# Altium PCB Photography_Light.PcbDoc
Units mil, origin at the board's own origin, x right, y up, seen from the top; angles counter-clockwise.
Board outline 2834.65 x 1653.54 mil, 2 copper layers (Top Layer, Bottom Layer), stack 62.8 mil thick; 18 components, 13 nets, 64 pads, 70 vias.
Unrouted connection lines stored in the file: 17.
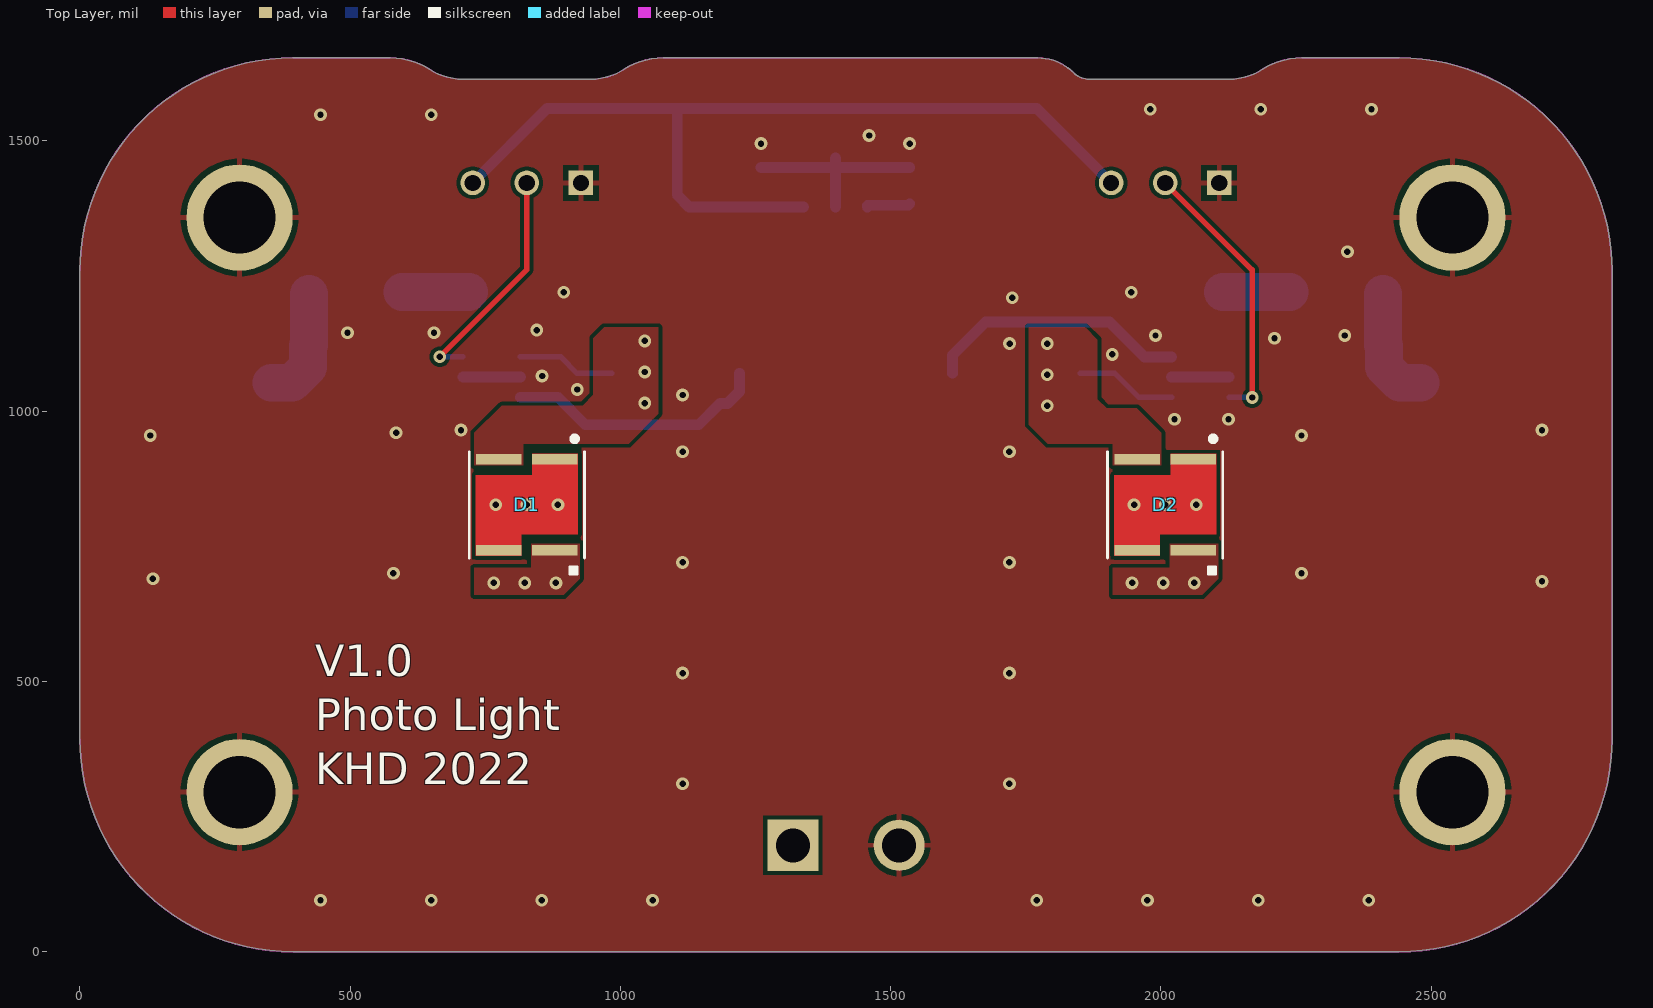
[diagram p0: Top Layer view]
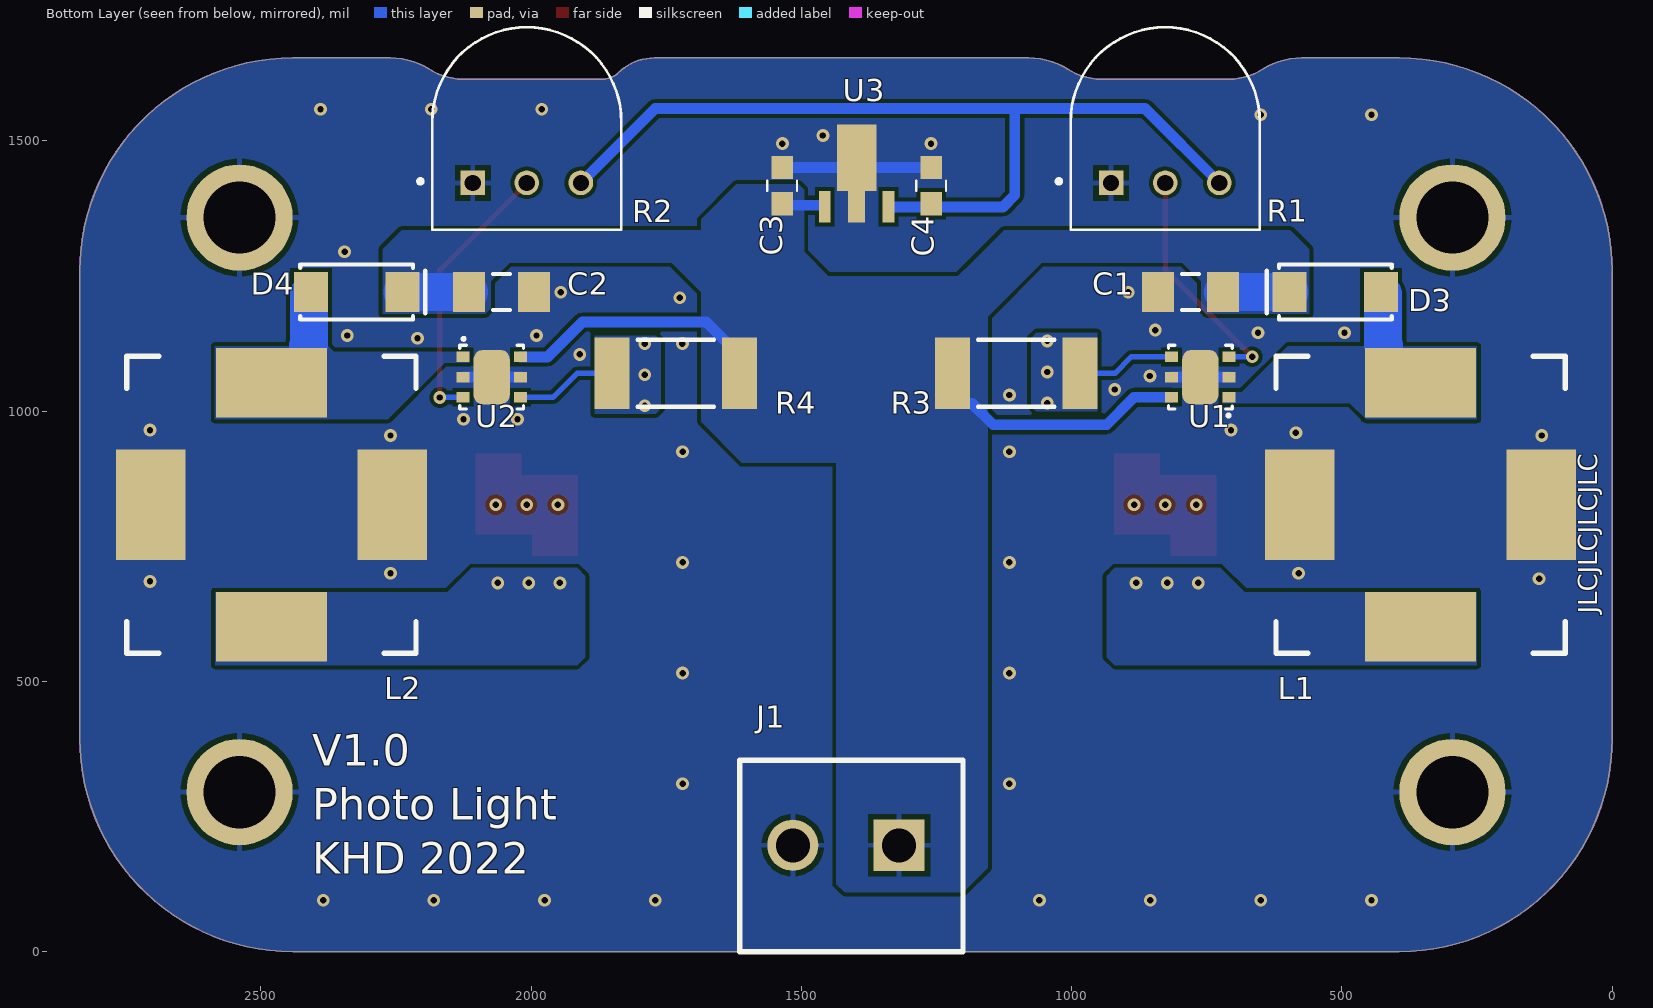
[diagram p1: Bottom Layer view, seen from below]
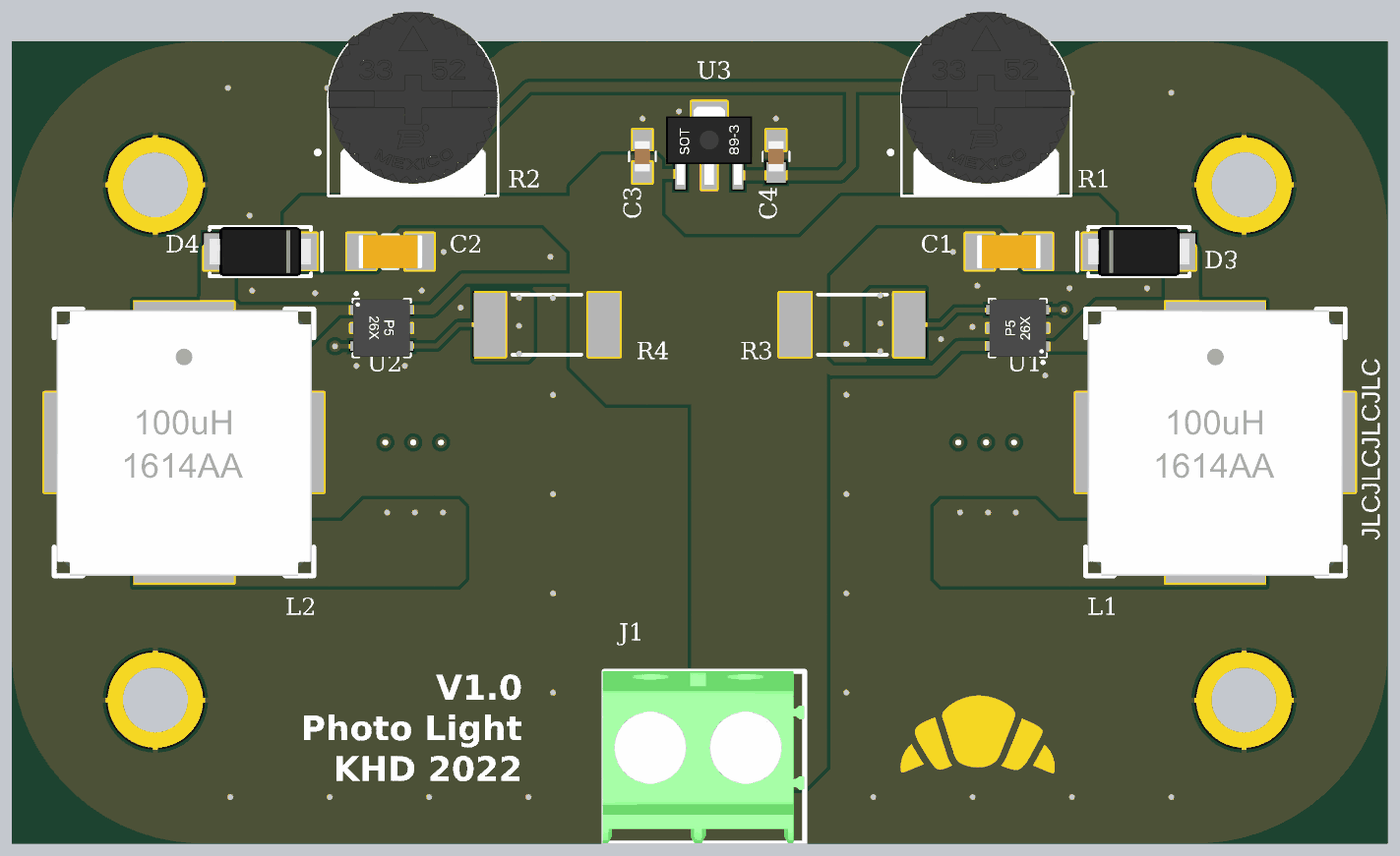
[diagram p2: 3D render of the assembled board from below, using the file's embedded part models]

## Layer stack, top to bottom
Top Solder: solder mask 0.4, Solder Resist, Dk 3.5
Top Layer: signal copper 1.4
Dielectric 1: dielectric 60, FR-4, Dk 4.8
Bottom Layer: signal copper 1.4
Bottom Solder: solder mask 0.4, Solder Resist, Dk 3.5

## Board outline
1838.86,1625.7 ccw(c1866.7,1653.55) 1866.7,1614.17 2125.98,1614.17 ccw(c2125.98,1728.9) 2187.88,1632.3 cw(c2260.4,1519.13) 2260.4,1653.54 2440.94,1653.54 cw(c2440.94,1259.84) 2834.65,1259.84 2834.65,393.7 cw(c2440.95,393.7) 2440.94,0 393.7,0 cw(c393.7,393.7) 0,393.7 0,1259.84 cw(c393.7,1259.84) 393.7,1653.54 574.24,1653.54 cw(c574.25,1519.14) 646.76,1632.3 ccw(c708.66,1728.9) 708.66,1614.17 944.88,1614.17 ccw(c944.88,1728.91) 1006.78,1632.3 cw(c1079.3,1519.13) 1079.3,1653.54 1771.65,1653.54 cw(c1771.65,1558.5)

## Design rules (kind name [scope] priority, off if disabled: settings)
Clearance [All] p1: gap=7 ignorepadtopadclearanceinfootprint=FALSE
HoleSize [All] p1: absolutevalues=TRUE maxlimit=150 minlimit=1 maxpercent=80.000 minpercent=20.000
PolygonConnect [All] p1: thpad.connectstyle=Relief thpad.reliefconductorwidth=10 thpad.reliefentries=4 thpad.polygonreliefangle="90 Angle" thpad.airgapwidth=10 smdpad.connectstyle=Direct smdpad.reliefconductorwidth=10 smdpad.reliefentries=4 smdpad.polygonreliefangle="90 Angle" smdpad.airgapwidth=10 via.connectstyle=Direct via.reliefconductorwidth=10 via.reliefentries=4 via.polygonreliefangle="90 Angle" via.airgapwidth=10
RoutingVias [All] p1: holewidth=28 width=50 viastyle="Through Hole" minholewidth=28 minwidth=50 maxholewidth=28 maxwidth=50
SolderMaskExpansion [All] p1: expansion=4 istentingtop=FALSE
Width [All] p1: maxlimit=100 minlimit=6 preferedwidth=10
29 further rules are at their usual default settings.

## Components (designator, comment, footprint, x,y, rotation, side; value= is the part's Value field where it differs from the comment)
C1 "C1206 10uF 35V X7R" C1206-IPC 780,1220.47 r180 bottom value=10uF
C2 "C1206 10uF 35V X7R" C1206-IPC 2054.65,1220.47 r0 bottom value=10uF
C3 "C0603 1uF 50V X7R" C0603-IPC 1535.43,1417.32 r270 bottom value=1uF
C4 "C0603 1uF 50V X7R" C0603-IPC 1259.84,1417.32 r270 bottom value=1uF
D1 "XHP50D-00-0000-0D0BJ20E7" "LED_XHP50B - 12V Configuration Only" 826.77,826.77 r90 top
D2 "XHP50D-00-0000-0D0UH40E3" "LED_XHP50B - 12V Configuration Only" 2007.87,826.77 r90 top
D3 "SK56AFL-TP" "DO221AC (SMA-FL)" 511.81,1220.47 r180 bottom
D4 "SK56AFL-TP" "DO221AC (SMA-FL)" 2322.83,1220.47 r0 bottom
J1 "Phoenix Contact 1935161" Phoenix_1935161 1417.32,196.85 r0 bottom
L1 "IHLE5050FHER101M51" IHLE-5050FH-51 354.33,826.77 r180 bottom value=100uH
L2 "IHLE5050FHER101M51" IHLE-5050FH-51 2480.32,826.77 r180 bottom value=100uH
R1 "CTRL_3000K" TRIM_3352T-1-103LF 826.77,1535.43 r180 bottom
R2 "CTRL_5000K" TRIM_3352T-1-103LF 2007.87,1535.43 r180 bottom
R3 "R2512 0.1R 1%" R2512-IPC 1102.36,1070 r0 bottom value=0.1
R4 "R2512 0.1R 1%" R2512-IPC 1732.28,1070 r180 bottom value=0.1
U1 "AL8862FF-7" U-DFN3030-6 761.81,1062.99 r0 bottom
U2 "AL8862FF-7" U-DFN3030-6 2072.83,1062.99 r180 bottom
U3 "AP2204R-3.3TRG1" SOT-89 1397.64,1377.95 r180 bottom

## Footprints (in the part's own frame and the unit in brackets; to place one, negate y for a bottom-side part, rotate by r counter-clockwise, add the part's x,y. Pads: shape width x height; smd on the part's side, far side on the other; paste and mask are expansions set on the pad)
C0603-IPC [mm]
  rect 1.1x1 smd: 1(-0.85,0) 2(0.85,0)
  silkscreen extent -0.24,-0.7 0.26,0.7, body extent -0.8,-0.4 0.8,0.4, height 0.3
C1206-IPC [mm] "Chip Capacitor, 2-Leads, Body 3.20x1.60mm, IPC Low Density"
  rect 1.5x1.9 smd: 1(-1.525,0) 2(1.525,0)
  silkscreen extent -0.4,-0.85 0.4,0.85, body extent -1.68,-0.87 1.68,0.87, height 0.71
"DO221AC (SMA-FL)" [mm] "SMA-FL DO221AC"
  rect 1.6x1.9 smd: A(2.15,0) K(-2.15,0)
  silkscreen extent -3.22,-1.29 2.65,1.29, body extent -2.65,-1.29 2.65,1.29, height 0.9
IHLE-5050FH-51 [mm] "Vishay IHLE High Current Inductors with E-Field Shield"
  rect 5.21x3.265 smd: 1(0,5.733) 2(0,-5.733)
  rect 3.275x5.21 smd: SHIELD(-5.677,0) SHIELD(5.677,0)
  silkscreen extent -6.79,-6.99 6.79,6.99, body extent -6.68,-6.99 6.68,6.93, height 6.52
"LED_XHP50B - 12V Configuration Only" [mm] "Cree XHP50.3 12V Footprint"
  rect 0.5x2.14 smd: A+(2.14,1.32) AC(-2.14,1.32) AC(2.14,-1.32) B-(-2.14,-1.32)
  rect 0.5x0.5 smd paste-1 mask+0: AC(0,0)
  Top Layer region: 1.39,-0.25 2.39,-0.25 2.39,-2.39 -1.39,-2.39 -1.39,0.25 -2.39,0.25 -2.39,2.39 1.39,2.39
  silkscreen extent -3.27,-2.71 3.2,2.71, body extent -2.5,-2.5 2.5,2.5, height 3.49
Phoenix_1935161 [mm] "Phoenix Contact 1935161 2-pos terminal block"
  rect 2.4x2.4 hole 1.6: 1(-2.5,0)
  round 2.4 hole 1.6: 2(2.5,0)
  silkscreen extent -5.5,-4 5,5, body extent -5.48,-4 5.09,5, height 11.41
R2512-IPC [mm] "Chip Resistor, 2-Leads, Body 6.35x3.10mm, IPC Low Density"
  rect 1.65x3.35 smd: 1(-3,0) 2(3,0)
  silkscreen extent -1.8,-1.58 1.8,1.58, body extent -3.27,-1.63 3.27,1.63, height 0.7
SOT-89 [mm] "SOT-89 for AP2204R"
  rect 0.55x1.475 smd: 1(-1.5,0) 3(1.5,0)
  rect 0.8x1.475 smd: 2(0,0)
  rect 1.85x3.125 smd: 2(0,2.3)
  body extent -2.25,-0.5 2.25,3.6, height 1.5
TRIM_3352T-1-103LF [mm]
  rect 1.16x1.16 hole 0.76: 1(-2.54,-2.87)
  round 1.16 hole 0.76: 2(0,-2.87) 3(2.54,-2.87)
  silkscreen extent -5.1,-5.08 4.44,4.44, body extent -4.44,-5.08 4.44,4.57, height 4.03
U-DFN3030-6 [mm] "Diodes Inc DFN3030 6 Pin EP"
  rect 0.6x0.5 smd mask+0.06: 1(-1.35,0.95) 2(-1.35,0) 3(-1.35,-0.95) 4(1.35,-0.95) 5(1.35,0) 6(1.35,0.95)
  rrect50% 1.7x2.55 smd mask+0: 7(0,0)
  silkscreen extent -1.5,-1.5 1.5,1.87, body extent -1.5,-1.5 1.5,1.5, height 0.6

## Part data
C1 C2: library part "C1206 10uF 25V X7R", "CAP CER 10UF 35V X7R 1206", Max. Voltage=35V, Supplier Part Number 1=CL31B106KLHNNNE, EIA Code=X7R, Features="Soft Termination", Supplier 1=Digi-Key
C3 C4: "CAP CER 1UF 50V X7R 0603", Max. Voltage=50V, EIA Code=X7R
D1: "3000K LED Lighting series White, Warm 3000K 11.2V 700mA 120° 2020 (5050 Metric)", Supplier Part Number 1=90-XHP50D-00-0000-0D0BJ20E7CT-ND, MF="Cree Inc.", MP=XHP50D-00-0000-0D0BJ20E7, Supplier 1=Digi-Key, Supplier 2=Mouser, Supplier Part Number 2=941-XHP50D00D0BJ20E7
D2: "5000K LED Lighting series White, Cool 5000K 11.2V 700mA 120° 2020 (5050 Metric)", Supplier Part Number 1=90-XHP50D-00-0000-0D0UH40E3CT-ND, MF="Cree Inc.", MP=XHP50D-00-0000-0D0UH40E3, Supplier 1=Digi-Key, Supplier 2=Mouser, Supplier Part Number 2=941-XHP50D00D0UH40E3
D3 D4: "Diode Schottky 60 V 5A Surface Mount DO-221AC (SMA-FL)", Supplier Part Number 1=SK56AFL-TPMSCT-ND, Supplier 1=Digi-Key, Supplier 2=Mouser, Supplier Part Number 2=833-SK56AFL-TP
J1: library part "Term Block 2pos", "Terminal Block, 2 Position, 5mm pitch, 18A, 300V, 12-26 AWG", Manufacturer="Phoenix Contact", Manufacturer Part Number=1935161, Supplier Part Number 1=277-1667-ND, Supplier 1=Digi-Key
L1 L2: library part IHLE-5050FH-51, "100 µH Shielded Wirewound Inductor 3.1 A 205mOhm Max Nonstandard", Saturation Current="4.3 A", Supplier Part Number 1=541-IHLE5050FHER101M51CT-ND, Supplier 1=Digi-Key, Supplier 2=Mouser, Supplier Part Number 2=70-IHLE5050FHR101M51
R1 R2: library part "RPot 10k Thumbwheel", "10 kOhms 0.5W, 1/2W Through Hole Thumbwheel Potentiometer Top Adjustment", Supplier Part Number 1=3352T-103LF-ND, Supplier 1=Digi-Key, Supplier 2=Mouser, Supplier Part Number 2=652-3352T-1-103LF
R3 R4: "Chip Resistor, 2512, 0.1 ohms, 3W", Supplier Part Number 1=696-1842-1-ND, Supplier 1=Digi-Key
U1 U2: "LED Driver IC 1 Output DC DC Regulator Step-Down (Buck) Analog, PWM Dimming 1A 6-DFN (3x3)", Supplier Part Number 1=31-AL8862FF-7CT-ND, Supplier 1=Digi-Key, Supplier 2=Mouser, Supplier Part Number 2=621-AL8862FF-7
U3: "Fixed 24V 3.3V 150mA SOT-89(SOT-89-3) Low Dropout Regulators(LDO)", Supplier Part Number 1=AP2204R-3.3TRG1DICT-ND, Supplier 1=Digi-Key, Supplier 2=Mouser, Supplier 3=LCSC, Supplier Part Number 2=621-AP2204R-3.3TRG1, Supplier Part Number 3=C156303

## Free pads (board coordinates)
  round 196.85 hole 133.86: MH(295.28,295.28) MH(295.28,1358.27) MH(2539.37,295.28) MH(2539.37,1358.27)

## Via types
v1: diameter 23.62, hole 11.81, Top Layer to Bottom Layer, tented both sides, 70 vias

## Nets (pads, with @x,y where several pads share a name; then routed paths per layer and width w, separated by ;. In a path a pad name is that pad's centre, name@x,y a point inside that pad or via, vN(x,y) a via of type N, cw(c..) or ccw(c..) an arc to the next point about the centre after c; other vN are vias at no path point)
3V3: C4.2 R1.3 R2.3 U3.3 | length 1697.8
  Bottom Layer w20: R1.3 864.33,1560 1105,1560 ; U3.3 1259.84,1377.95 1127.05,1377.95 1105,1400 1105,1560 ; R2.3 1770.32,1560 1105,1560
AC_3000K: D1.AC
  other v1: 769.27,826.77 826.77,826.77 884.27,826.77
AC_5000K: D2.AC
  other v1: 1950.37,826.77 2007.87,826.77 2065.37,826.77
CTRL_3000K: R1.2 U1.3 | length 431.4
  Top Layer w10: v1(665.77,1100.77) 826.77,1261.77 R1.2
  Bottom Layer w10: v1(665.77,1100.77) 665.95,1100.58 708.47,1100.58 U1.3
CTRL_5000K: R2.2 U2.3 | length 507
  Top Layer w10: R2.2 2168.88,1261.44 v1(2168.88,1025.22)
  Bottom Layer w10: U2.3 2126.17,1025.4 2168.69,1025.4 v1(2168.88,1025.22)
GND: C1.1 C2.1 C3.1 C4.1 J1.2 L1.SHIELD L2.SHIELD pad.MH R1.1 R2.1 U1.2 U1.5 U1.7 U2.2 U2.5 U2.7 U3.2 | length 578.7
  Bottom Layer w20: U1.2 U1.7 U1.5 ; C4.1 U3.2@1397.64,1450.79 ; U3.2@1397.64,1377.95 U3.2@1397.64,1450.79 ; U3.2@1397.64,1468.5 U3.2@1397.64,1450.79 ; C3.1 U3.2@1397.64,1450.79 ; U2.5 U2.7 U2.2
  other v1: 445,95 649.81,95 854.63,95 1059.44,95 1770.2,95 1975.02,95 2179.83,95 2384.65,95 1115,310.56 1719.65,310.56 1115,515.37 1719.65,515.37 2705,685 135,690 580,700 2260,700 1115,720.19 1719.65,720.19 1115,925 1719.65,925 130,955 2260,955 585,960 705,965 2705,965 2025,985 2125,985 1115,1030 920,1040 855,1065 1910,1105 1720,1125 2210,1135 1990,1140 2340,1140 495,1145 655,1145 845,1150 1725,1210 895,1220 1945,1220 2345,1295 1260,1495 1535,1495 1460,1510 445,1548.54 649.81,1548.54 1980.02,1558.54 2184.83,1558.54 2389.65,1558.54
NetD1_A+: D1.A+ R3.1 U1.4 | length 181.9
  Bottom Layer w10: U1.4 889.61,1100.39 920,1070 R3.1
  other v1: 1045,1015 1045,1072.5 1045,1130
NetD1_B-: D1.B- L1.2
  other v1: 765.54,682.31 823.04,682.31 880.54,682.31
NetD2_A+: D2.A+ R4.1 U2.4 | length 187.7
  Bottom Layer w10: R4.1 1915,1070 1959.41,1025.59 U2.4
  other v1: 1789.65,1010 1789.65,1067.5 1789.65,1125
NetD2_B-: D2.B- L2.2
  other v1: 1946.64,682.31 2004.14,682.31 2061.64,682.31
NetD3_A: D3.A L1.1 U1.1 | length 215.5
  Bottom Layer w70: L1.1 392.62,1052.46 421.89,1081.73 421.89,1121.06 423.56,1122.74 D3.A@423.56,1216.87
NetD4_A: D4.A L2.1 U2.1 | length 304.7
  Bottom Layer w50: L2.1@2407.48,1091.73 2446.75,1052.46 L2.1
  Bottom Layer w70: D4.A@2411.01,1216.94 2411.01,1122.74 2412.76,1120.99 2412.76,1081.73 2442.03,1052.46 L2.1
VIN: C1.2 C2.2 C3.2 D3.K D4.K J1.1 R3.2 R4.2 U1.6 U2.6 U3.1 | length 1306.1
  Bottom Layer w20: U1.6 884.41,1025.59 935,975 1145,975 1184.06,1014.06 1197.99,1014.06 1220.47,1036.54 R3.2 ; U3.1 1456.69,1380.08 1457.52,1380.91 1532.48,1380.91 C3.2 ; R4.2 1614.17,1103.46 1675.71,1165 1905,1165 1969.61,1100.39 U2.6
  Bottom Layer w70: D3.K C1.2 ; C2.2 D4.K

## Polygon pours and split planes (outlines as drawn)
GND on Bottom Layer "NONET_L-01_P-001" (solid, pour order 16): -0.25,393.7 -0.25,1259.84 cw(c393.7,1259.84) 393.68,1653.79 393.7,1653.79 574.24,1653.79 cw(c574.24,1519.13) 646.89,1632.52 646.9,1632.51 ccw(c708.66,1728.9) 708.66,1614.42 944.88,1614.42 ccw(c944.88,1728.9) 1006.64,1632.51 cw(c1079.3,1519.12) 1079.29,1653.79 1079.3,1653.79 1771.65,1653.79 cw(c1771.65,1558.49) 1839.03,1625.89 1839.04,1625.88 ccw(c1866.7,1653.55) 1866.7,1614.42 2125.98,1614.42 ccw(c2125.98,1728.9) 2187.75,1632.51 cw(c2260.4,1519.11) 2260.38,1653.79 2260.4,1653.79 2440.94,1653.79 cw(c2440.94,1259.84) 2834.9,1259.84 2834.9,393.7 cw(c2440.94,393.7) 2440.94,-0.25 393.7,-0.25 cw(c393.7,393.7)
VIN on Bottom Layer "NONET_L-01_P-001" (solid, pour order 14): 2274.65,1180 2274.65,1300 2239.65,1335 1685,1335 1564.65,1214.65 1564.65,990 1659.65,990 1679.65,1010 1679.65,1214.65 1740,1275 2039.65,1275 2074.65,1240 2074.65,1190 2084.65,1180
VIN on Bottom Layer "NONET_L-01_P-001" (solid, pour order 13): 560,1180 560,1300 595,1335 1125,1335 1270,1190 1270,990 1175,990 1155,1010 1155,1175 1055,1275 795,1275 760,1240 760,1190 750,1180
VIN on Bottom Layer "NONET_L-01_P-001" (solid, pour order 12): 1200,110 1420,110 1435,125 1435,905 1610,905 1685,980 1685,1355 1620,1420 1505,1420 1495,1410 1495,1295 1450,1250 1210,1250 1155,1195 1155,155
NetD2_B- on Bottom Layer "NONET_L-01_P-001" (solid, pour order 11): 2584.65,665 2154.65,665 2109.65,710 1914.65,710 1899.65,695 1899.65,545 1914.65,530 2584.65,530
NetD1_B- on Bottom Layer "NONET_L-01_P-001" (solid, pour order 9): 250,665 680,665 725,710 920,710 935,695 935,545 920,530 250,530
NetD2_A+ on Bottom Layer "NONET_L-01_P-001" (solid, pour order 7): 1769.65,1140 1759.65,1130 1759.65,1005 1769.65,995 1882.38,995 1882.38,1140
NetD1_A+ on Bottom Layer "NONET_L-01_P-001" (solid, pour order 6): 1065,1000 1075,1010 1075,1135 1065,1145 952.27,1145 952.27,1000
NetD3_A on Bottom Layer "NONET_L-01_P-001" (solid, pour order 3): 720,1015 485,1015 455,985 250,985 250,1120 600,1120 685,1035 720,1035
GND on Bottom Layer "NONET_L-01_P-001" (solid, pour order 2): 794.65,1005 794.65,1125 849.65,1180 874.65,1180 874.65,1260 809.65,1260 809.65,1220 729.65,1140 729.65,1005
GND on Bottom Layer "NONET_L-01_P-001" (solid, pour order 1): 2040,1005 2040,1125 1985,1180 1960,1180 1960,1260 2025,1260 2025,1220 2105,1140 2105,1005
NetD4_A on Bottom Layer "NONET_L-01_P-001" (solid, pour order 0): 2114.19,1110 2365,1110 2375,1120 2585,1120 2585,985 2265,985 2160,1090 2114.19,1090
GND on Top Layer "NONET_L-01_P-001" (solid, pour order 15): -0.25,393.7 -0.25,1259.84 cw(c393.7,1259.84) 393.68,1653.79 393.7,1653.79 574.24,1653.79 cw(c574.24,1519.13) 646.89,1632.52 646.9,1632.51 ccw(c708.66,1728.9) 708.66,1614.42 944.88,1614.42 ccw(c944.88,1728.9) 1006.64,1632.51 cw(c1079.3,1519.12) 1079.29,1653.79 1079.3,1653.79 1771.65,1653.79 cw(c1771.65,1558.49) 1839.03,1625.89 1839.04,1625.88 ccw(c1866.7,1653.55) 1866.7,1614.42 2125.98,1614.42 ccw(c2125.98,1728.9) 2187.75,1632.51 cw(c2260.4,1519.11) 2260.38,1653.79 2260.4,1653.79 2440.94,1653.79 cw(c2440.94,1259.84) 2834.9,1259.84 2834.9,393.7 cw(c2440.94,393.7) 2440.94,-0.25 393.7,-0.25 cw(c393.7,393.7)
NetD2_B- on Top Layer "NONET_L-01_P-001" (solid, pour order 10): 2016.1,755 2106.1,755 2106.1,690 2076.1,660 1911.1,660 1911.1,710 2016.1,710
NetD1_B- on Top Layer "NONET_L-01_P-001" (solid, pour order 8): 835,755 925,755 925,690 895,660 730,660 730,710 835,710
NetD2_A+ on Top Layer "NONET_L-01_P-001" (solid, pour order 5): 2000.71,900 2000.71,960 1955.71,1005 1900,1005 1882.61,1022.39 1882.61,1132.39 1860,1155 1755.71,1155 1755.71,975 1790.71,940 1910.71,940 1910.71,900
NetD1_A+ on Top Layer "NONET_L-01_P-001" (solid, pour order 4): 730,900 730,960 780,1010 930,1010 950,1030 950,1135 970,1155 1070,1155 1070,995 1015,940 820,940 820,900

## Keep-outs
Keep-Out Layer:
  lines w0.5: -0.25,393.7 ccw(c0,393.7) -0.25,393.7 ; -0.25,393.7 ccw(c0,393.7) -0.25,393.7 ; -0.25,393.7 ccw(c393.7,393.7) 393.7,-0.25 ; -0.25,393.7 -0.25,1259.84 ; -0.25,393.7 -0.25,393.7 ; -0.25,1259.84 cw(c393.7,1259.84) 393.68,1653.79 ; -0.25,1259.84 -0.25,1259.84 ; 393.68,1653.79 cw(c393.7,1653.54) 393.7,1653.79 ; 393.68,1653.79 cw(c393.7,1259.84) 393.7,1653.79 ; 393.7,-0.25 ccw(c393.7,0) 393.7,-0.25 ; 393.7,-0.25 ccw(c393.7,0) 393.7,-0.25 ; 393.7,-0.25 2440.94,-0.25 2440.94,-0.25 ccw(c2440.95,393.7) 2834.9,393.69 ccw(c2834.65,393.7) 2834.9,393.7 2834.9,1259.84 ccw(c2440.94,1259.84) 2440.94,1653.79 2440.94,1653.79 2260.4,1653.79 ; 393.7,-0.25 393.7,-0.25 ; 393.7,-0.25 393.7,-0.25 ; 393.7,1653.79 574.24,1653.79 ; 574.24,1653.79 cw(c574.24,1653.54) 574.25,1653.79 ; 574.24,1653.79 cw(c574.25,1519.14) 574.25,1653.79 ; 574.25,1653.79 cw(c574.25,1519.14) 646.89,1632.52 ; 646.89,1632.52 cw(c574.25,1519.14) 646.9,1632.51 ; 646.89,1632.52 cw(c646.76,1632.3) 646.9,1632.51 ; 646.9,1632.51 ccw(c708.66,1728.9) 708.66,1614.42 ; 708.66,1614.42 ccw(c708.66,1614.17) 708.66,1614.42 ; 708.66,1614.42 ccw(c708.66,1614.17) 708.66,1614.42 ; 708.66,1614.42 944.88,1614.42 ; 708.66,1614.42 708.66,1614.42 ; 708.66,1614.42 708.66,1614.42 ; 944.88,1614.42 ccw(c944.88,1728.91) 1006.64,1632.51 ; 944.88,1614.42 944.88,1614.42 ; 1006.65,1632.52 ccw(c1079.3,1519.13) 1006.65,1632.51 ; 1006.65,1632.52 cw(c1079.3,1519.13) 1079.29,1653.79 ; 1006.65,1632.52 ccw(c1006.78,1632.3) 1006.64,1632.51 ; 1079.29,1653.79 cw(c1079.3,1653.54) 1079.3,1653.79 ; 1079.29,1653.79 cw(c1079.3,1519.13) 1079.3,1653.79 ; 1079.3,1653.79 ccw(c1079.3,1653.54) 1079.3,1653.79 ; 1079.3,1653.79 1771.65,1653.79 ; 1771.66,1653.79 ccw(c1771.65,1653.54) 1771.65,1653.79 ; 1771.66,1653.79 ccw(c1771.65,1558.5) 1771.65,1653.79 ; 1771.66,1653.79 cw(c1771.65,1558.5) 1839.03,1625.89 ; 1839.04,1625.88 ccw(c1771.65,1558.5) 1839.03,1625.89 ; 1839.04,1625.88 ccw(c1866.7,1653.55) 1866.7,1614.42 ; 1839.04,1625.88 ccw(c1838.86,1625.7) 1839.03,1625.89 ; 1866.7,1614.42 ccw(c1866.7,1614.17) 1866.7,1614.42 ; 1866.7,1614.42 ccw(c1866.7,1614.17) 1866.7,1614.42 ; 1866.7,1614.42 2125.98,1614.42 ; 1866.7,1614.42 1866.7,1614.42 ; 2125.98,1614.42 ccw(c2125.98,1728.9) 2187.75,1632.51 ; 2125.98,1614.42 2125.98,1614.42 ; 2187.76,1632.52 ccw(c2260.4,1519.13) 2187.75,1632.51 ; 2187.76,1632.52 cw(c2260.4,1519.13) 2260.38,1653.79 ; 2187.76,1632.52 ccw(c2187.88,1632.3) 2187.75,1632.51 ; 2260.38,1653.79 cw(c2260.4,1653.54) 2260.4,1653.79 ; 2260.38,1653.79 cw(c2260.4,1519.13) 2260.4,1653.79

## Silkscreen, mask and mechanical layers (free items; w line width, h text height)
Top Overlay:
  text "V1.0 / Photo Light / KHD 2022" at 435,290 h100
Bottom Overlay:
  text "JLCJLCJLCJLC" at 15.67,624.89 h60 r270
  text "V1.0 / Photo Light / KHD 2022" at 2404.65,125 h100
Top Solder:
  drawing of 5 lines, arcs and shapes, not listed
Bottom Solder:
  drawing of 5 lines, arcs and shapes, not listed
Mechanical 1:
  lines w0.5: 2440.94,-0.25 2440.94,-0.25 ; -0.25,393.7 ccw(c0,393.7) -0.25,393.7 ; -0.25,393.7 ccw(c0,393.7) -0.25,393.7 ; -0.25,393.7 -0.25,393.7 ; 393.7,-0.25 ccw(c393.7,0) 393.7,-0.25 ; 393.7,-0.25 ccw(c393.7,0) 393.7,-0.25 ; 393.7,-0.25 393.7,-0.25 ; 393.7,-0.25 393.7,-0.25 ; 708.66,1614.42 ccw(c708.66,1614.17) 708.66,1614.42 ; 708.66,1614.42 ccw(c708.66,1614.17) 708.66,1614.42 ; 708.66,1614.42 708.66,1614.42 ; 708.66,1614.42 708.66,1614.42 ; 1006.65,1632.52 ccw(c1079.3,1519.13) 1006.65,1632.51 ; 1006.65,1632.52 ccw(c1006.78,1632.3) 1006.64,1632.51 ; 1771.66,1653.79 ccw(c1771.65,1653.54) 1771.65,1653.79 ; 1771.66,1653.79 ccw(c1771.65,1558.5) 1771.65,1653.79 ; 1839.04,1625.88 ccw(c1771.65,1558.5) 1839.03,1625.89 ; 1839.04,1625.88 ccw(c1838.86,1625.7) 1839.03,1625.89 ; 1866.7,1614.42 ccw(c1866.7,1614.17) 1866.7,1614.42 ; 1866.7,1614.42 ccw(c1866.7,1614.17) 1866.7,1614.42 ; 1866.7,1614.42 1866.7,1614.42 ; 2187.76,1632.52 ccw(c2260.4,1519.13) 2187.75,1632.51 ; 2187.76,1632.52 ccw(c2187.88,1632.3) 2187.75,1632.51 ; 393.68,1653.79 cw(c393.7,1653.54) 393.7,1653.79 ccw(c393.7,1259.84) 393.68,1653.79 ; 574.24,1653.79 cw(c574.24,1653.54) 574.25,1653.79 ccw(c574.25,1519.14) 574.24,1653.79 ; 646.89,1632.52 cw(c574.25,1519.14) 646.9,1632.51 ccw(c646.76,1632.3) 646.89,1632.52 ; 944.88,1614.42 944.88,1614.42 ; 2125.98,1614.42 2125.98,1614.42 ; 2260.38,1653.79 cw(c2260.4,1653.54) 2260.4,1653.79 ccw(c2260.4,1519.13) 2260.38,1653.79